# EAGLE board allinone (EAGLE 7.6.0), part 1 of 2
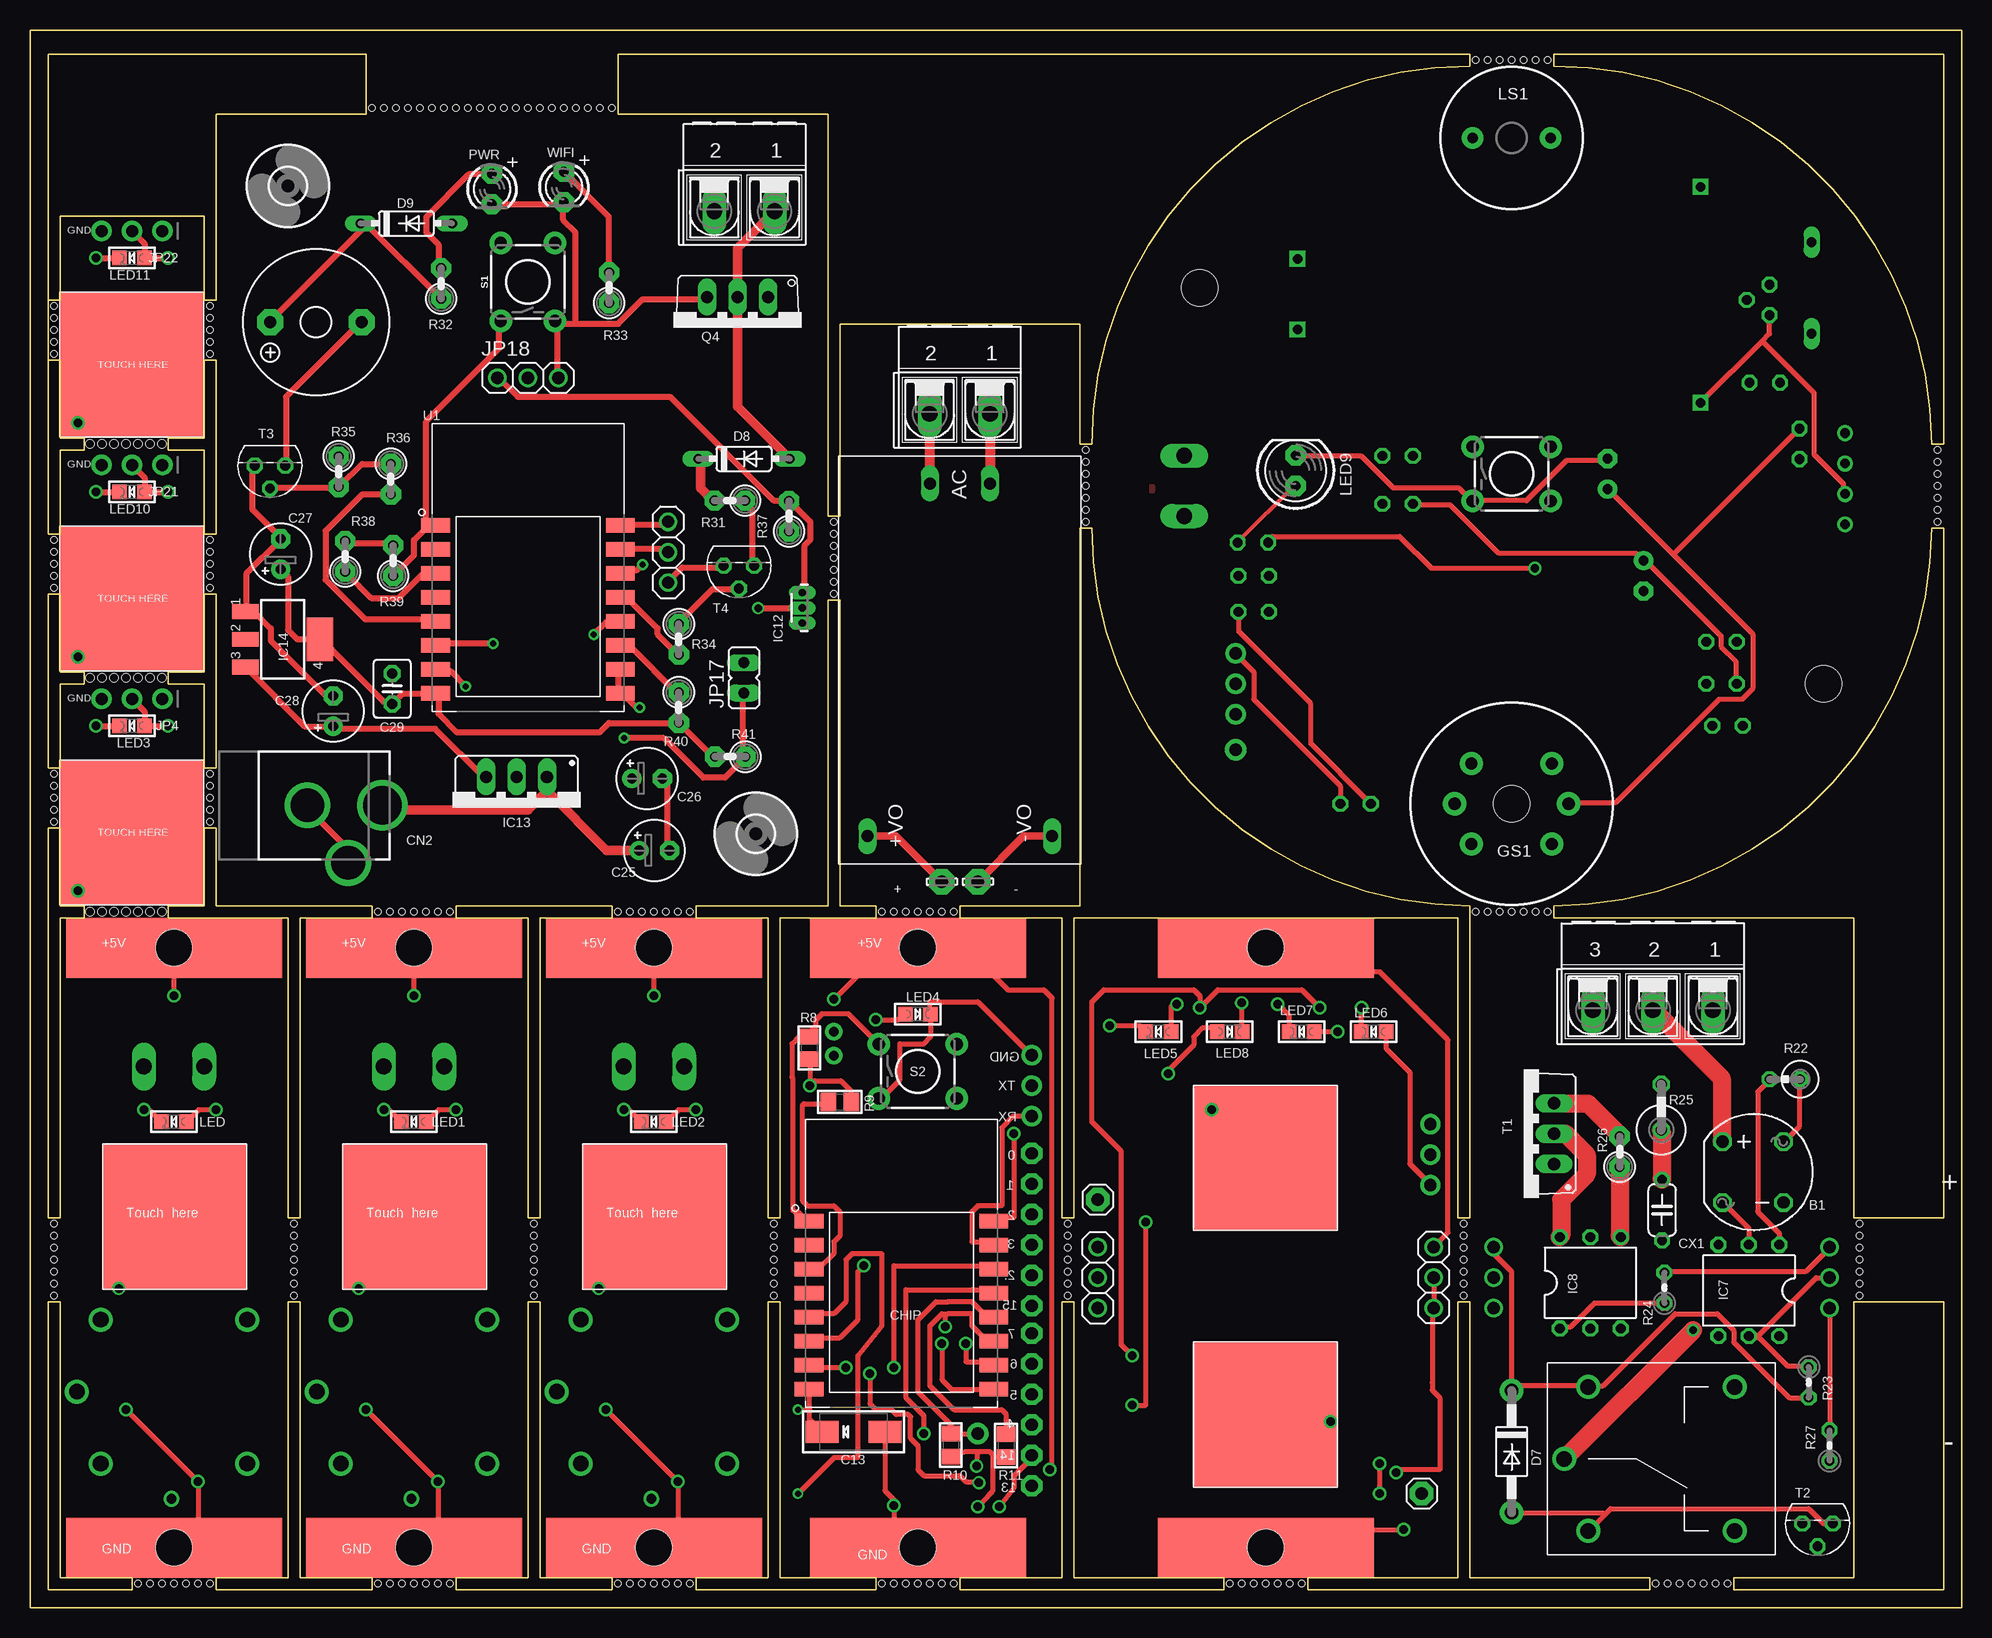
[diagram p0: board, top side]
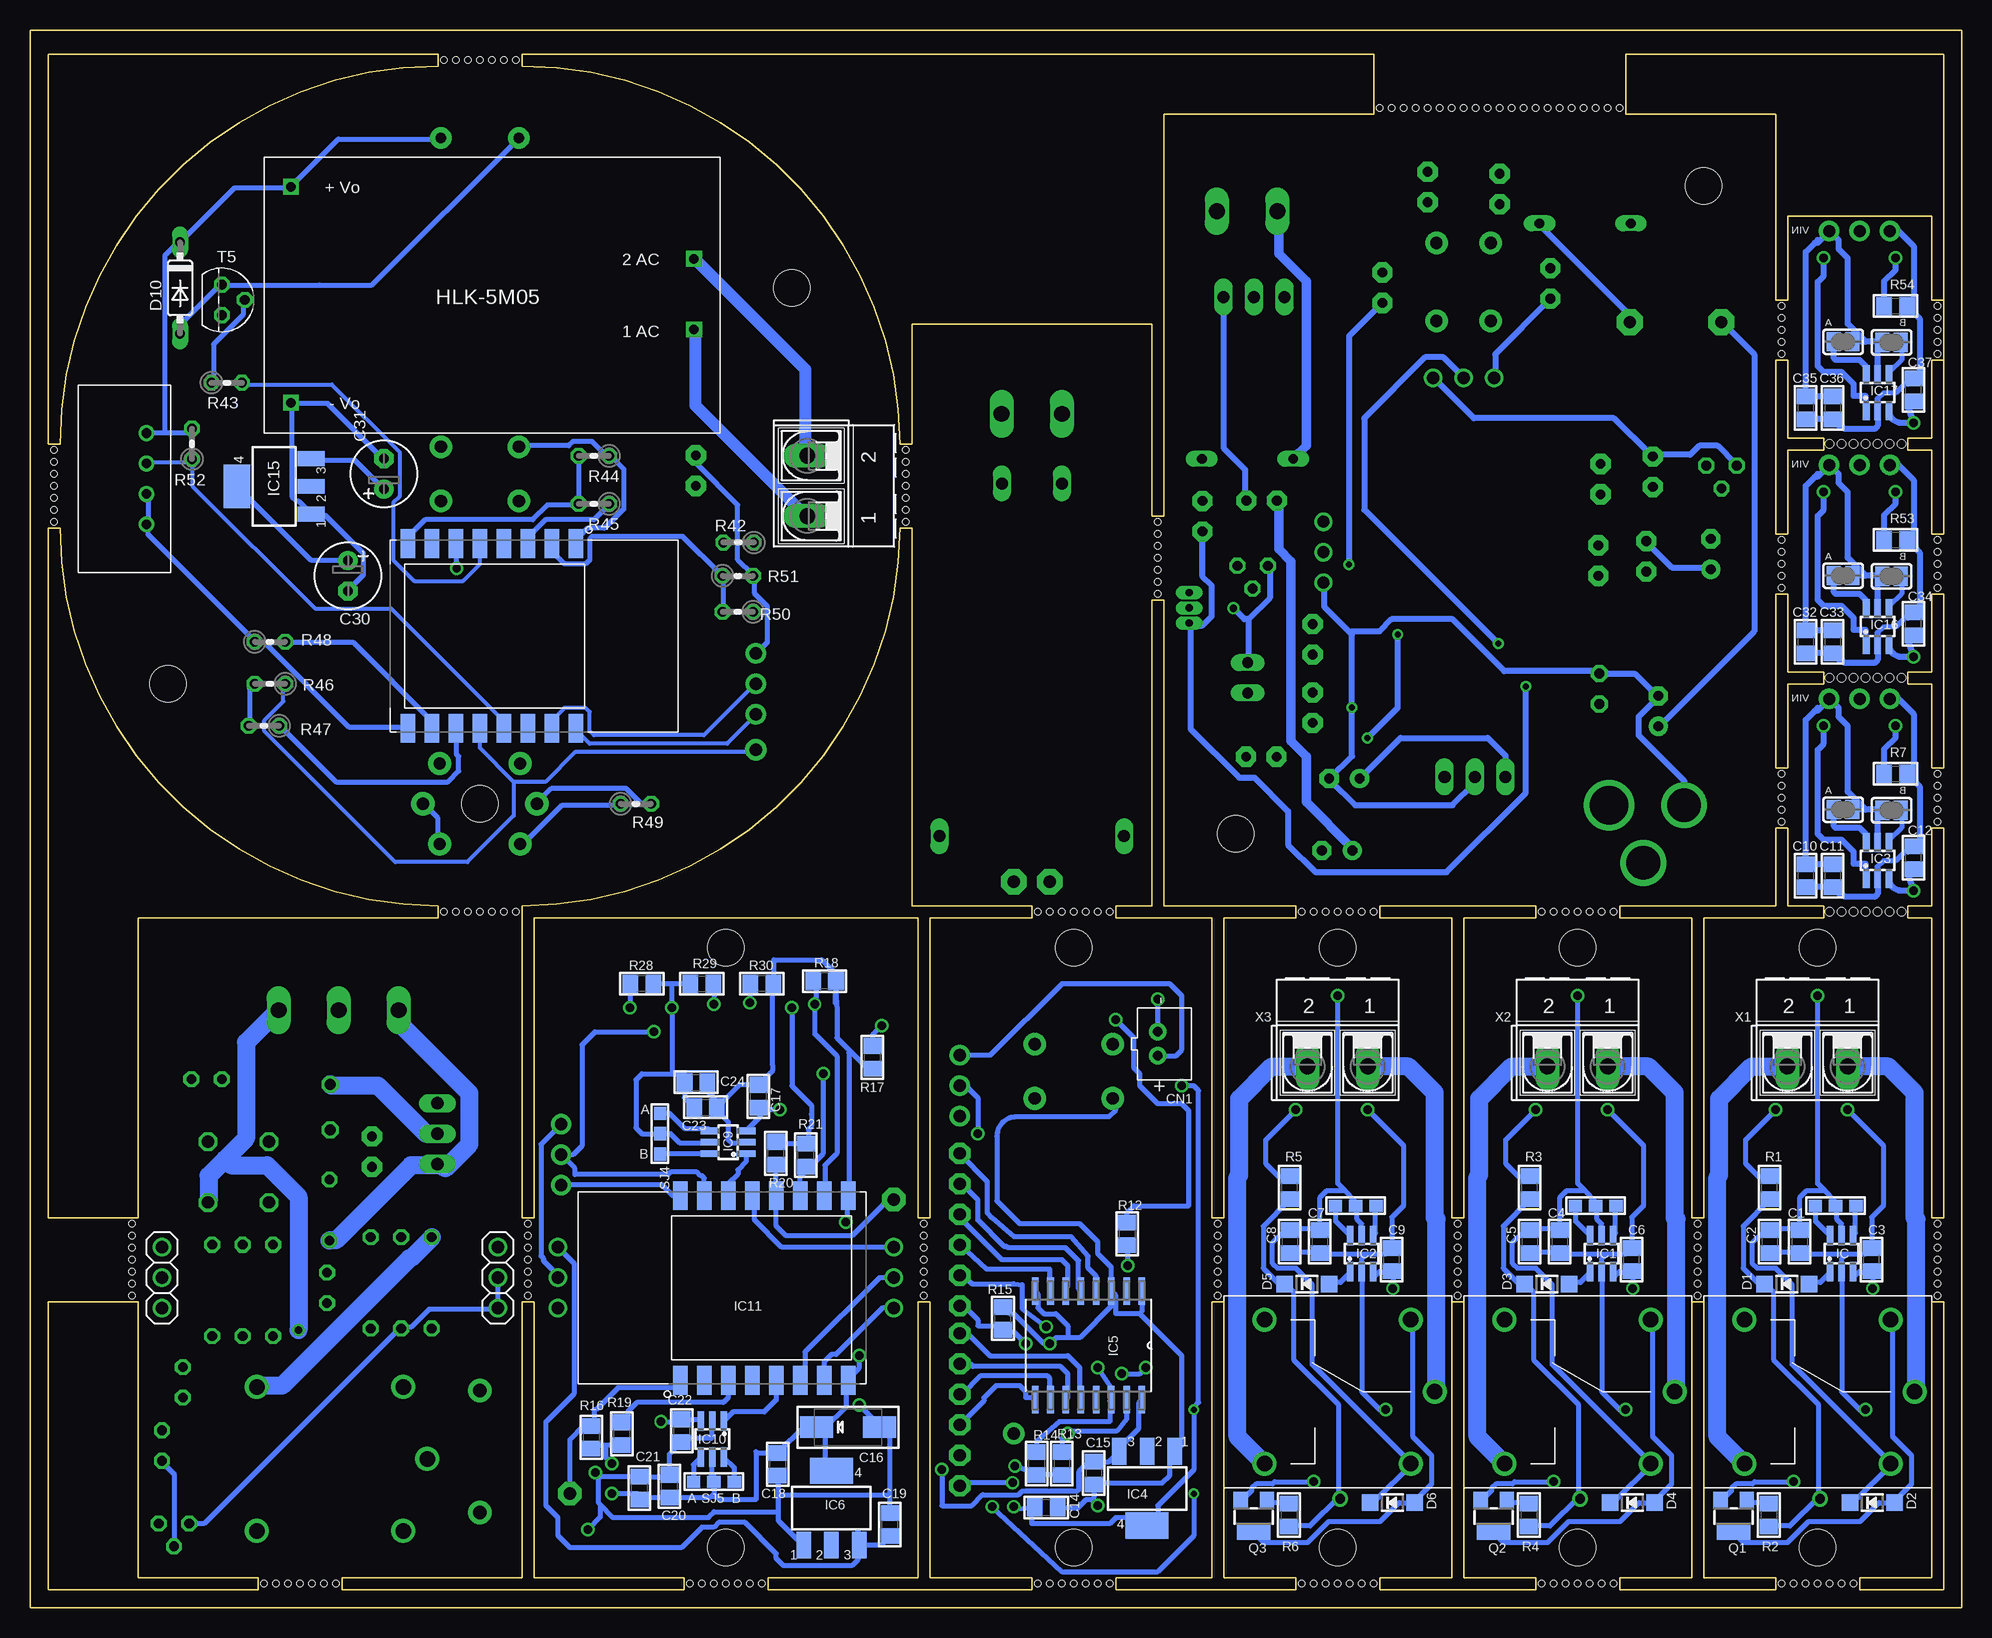
[diagram p1: board, bottom side, seen from below]

Size 161 x 131.5 mm. Coordinates in mm from the lower left corner, seen from the top.
Outline: 1.5,104 1.5,89.5 2.5,89.5 2.5,96.5 4.5,96.5 4.5,97.5 2.5,97.5 2.5,104 1.5,104
Outline: 1.5,104 1.5,109
Outline: 1.5,109 1.5,129.5 28,129.5 28,124.5 15.5,124.5 15.5,109 14.5,109 14.5,116 2.5,116 2.5,109 1.5,109
Outline: 2.5,2.5 8.5,2.5 8.5,1.5 1.5,1.5 1.5,25.5 2.5,25.5 2.5,2.5
Outline: 15.5,2.5 21.5,2.5 21.5,25.5 22.5,25.5 22.5,2.5 28.5,2.5 28.5,1.5 15.5,1.5 15.5,2.5
Outline: 21.5,32.5 21.5,57.5 11.5,57.5 11.5,58.5 14.5,58.5 14.5,65 15.5,65 15.5,58.5 28.5,58.5 28.5,57.5 22.5,57.5 22.5,32.5 21.5,32.5
Outline: 4.5,57.5 2.5,57.5 2.5,32.5 1.5,32.5 1.5,65 2.5,65 2.5,58.5 4.5,58.5 4.5,57.5
Outline: 35.5,2.5 41.5,2.5 41.5,25.5 42.5,25.5 42.5,2.5 48.5,2.5 48.5,1.5 35.5,1.5 35.5,2.5
Outline: 41.5,32.5 41.5,57.5 35.5,57.5 35.5,58.5 48.5,58.5 48.5,57.5 42.5,57.5 42.5,32.5 41.5,32.5
Outline: 55.5,2.5 61.5,2.5 61.5,25.5 62.5,25.5 62.5,2.5 70.5,2.5 70.5,1.5 55.5,1.5 55.5,2.5
Outline: 61.5,32.5 61.5,57.5 55.5,57.5 55.5,58.5 66.5,58.5 66.5,84 67.5,84 67.5,58.5 70.5,58.5 70.5,57.5 62.5,57.5 62.5,32.5 61.5,32.5
Outline: 14.5,70 14.5,77 11.5,77 11.5,78 14.5,78 14.5,84.5 15.5,84.5 15.5,70 14.5,70
Outline: 4.5,77 2.5,77 2.5,70 1.5,70 1.5,84.5 2.5,84.5 2.5,78 4.5,78 4.5,77
Outline: 77.5,2.5 86,2.5 86,25.5 87,25.5 87,2.5 99.5,2.5 99.5,1.5 77.5,1.5 77.5,2.5
Outline: 86,32.5 86,57.5 77.5,57.5 77.5,58.5 87.5,58.5 87.5,90 88.5,90 arc90 120,58.5 120,32.5 119,32.5 119,57.5 87,57.5 87,32.5 86,32.5
Outline: 67.5,107 67.5,91 66.5,91 66.5,124.5 49,124.5 49,129.5 120,129.5 120,128.5 arc90 88.5,97 87.5,97 87.5,107 67.5,107
Outline: 120,2.5 135,2.5 135,1.5 106.5,1.5 106.5,2.5 119,2.5 119,25.5 120,25.5 120,2.5
Outline: 142,2.5 152,2.5 152,25.5 159.5,25.5 159.5,1.5 142,1.5 142,2.5
Outline: 152,32.5 152,57.5 127,57.5 127,58.5 arc90 158.5,90 159.5,90 159.5,32.5 152,32.5
Outline: 15.5,104 15.5,89.5 14.5,89.5 14.5,96.5 11.5,96.5 11.5,97.5 14.5,97.5 14.5,104 15.5,104
Outline: 159.5,129.5 127,129.5 127,128.5 arc-90 158.5,97 159.5,97 159.5,129.5
Outline: 0,0 161,0 161,131.5 0,131.5 0,0
Copper layers (1*16): Top 0.035mm / dielectric 0.5mm / Bottom 0.035mm
Design rules "default *": minimum track width 12mil, minimum drill 10mil, track to track 8mil, track to pad 8mil, pad to pad 8mil, via to via 8mil, smd to smd 8mil, copper to edge 0.3mm, drill to drill 8mil, minimum pad ring 10mil, minimum via ring 8mil, stop-mask expansion 4mil, vias tented up to drill 0mil, thermal gap 10mil
Net classes: 1 AC: width 1.5 mm, clearance 0.381 mm to class 0, clearance 0.381 mm; 2 GPIO: width 0.35 mm, drill 0.7 mm, clearance 0.254 mm to class 0, clearance 0.254 mm to class 1, clearance 0.254 mm; 3 zerocross: width 0.35 mm, drill 0.7 mm, clearance 0.5 mm to class 0, clearance 0.5 mm to class 1, clearance 0.5 mm to class 2, clearance 0.3 mm
Holes 3 mm at 97.5,110 149.5,77
Holes 0.5 mm at 12,2 13,2 14,2 15,2 11,2 10,2 9,2 32,2 33,2 34,2 35,2 31,2 30,2 29,2 52,2 53,2 54,2 55,2 51,2 50,2 49,2 74,2 75,2 76,2 77,2 73,2 72,2 71,2 103,2 104,2 105,2 106,2 102,2 101,2 100,2 138.5,2 139.5,2 140.5,2 141.5,2 137.5,2 136.5,2 135.5,2 22,29 22,30 22,31 22,32 22,28 22,27 22,26 42,29 42,30 42,31 42,32 42,28 42,27 42,26 62,29 62,30 62,31 62,32 62,28 62,27 62,26 86.5,29 86.5,30 86.5,31 86.5,32 86.5,28 86.5,27 86.5,26 119.5,29 119.5,30 119.5,31 119.5,32 119.5,28 119.5,27 119.5,26 32,58 31,58 30,58 29,58 33,58 34,58 35,58 52,58 53,58 54,58 55,58 51,58 50,58 49,58 74,58 75,58 76,58 77,58 73,58 72,58 71,58 15,67.5 15,68.5 15,69.5 15,66.5 15,65.5 15,87 15,88 15,89 15,86 15,85 15,106.5 15,107.5 15,108.5 15,105.5 15,104.5 67,87.5 67,88.5 67,89.5 67,90.5 67,86.5 67,85.5 67,84.5 2,106.5 2,107.5 2,108.5 2,105.5 2,104.5 2,87 2,88 2,89 2,86 2,85 2,67.5 2,68.5 2,69.5 2,66.5 2,65.5 2,29 2,30 2,31 2,32 2,28 2,27 2,26 38.5,125 39.5,125 40.5,125 41.5,125 37.5,125 36.5,125 35.5,125 123.5,58 122.5,58 121.5,58 120.5,58 125.5,58 124.5,58 126.5,58 88,90.5 88,94.5 88,95.5 88,96.5 88,93.5 88,92.5 88,91.5 159,93.5 159,94.5 159,95.5 159,96.5 159,92.5 159,91.5 159,90.5 123.5,129 124.5,129 125.5,129 126.5,129 122.5,129 121.5,129 120.5,129 152.5,29 152.5,30 152.5,31 152.5,32 152.5,28 152.5,27 152.5,26 31.5,125 32.5,125 33.5,125 34.5,125 30.5,125 29.5,125 28.5,125 45.5,125 46.5,125 47.5,125 48.5,125 44.5,125 43.5,125 42.5,125
Holes 0.7 mm at 8,58 7,58 6,58 5,58 9,58 10,58 11,58 8,77.5 9,77.5 10,77.5 11,77.5 7,77.5 6,77.5 5,77.5 8,97 9,97 10,97 11,97 7,97 6,97 5,97

## Footprints (pad centres in the part's own frame; a part is rotated, then mirrored left to right if it is on the bottom)
AK500/2-H = drill 1.321 long: 1 -2.515,0; 2 2.515,0
RB1A = drill 1.016 octagon: + -2.54,2.54; - 2.54,-2.54; AC1 2.54,2.54; AC2 -2.54,-2.54
0805 = smd 1.3 x 1.5: 1 -0.95,0; 2 0.95,0
EIA6032-28/C-W = smd 2.75 x 1.8: + 2.625,0; - -2.625,0
E2,5-5 = drill 0.813 pad 1.6: + -1.27,0 | drill 0.813 pad 1.6 octagon: - 1.27,0
C025-030X050 = drill 0.813 pad 1.422 octagon: 1 -1.27,0; 2 1.27,0
E2,5-6 = drill 0.813 pad 1.6: + -1.27,0 | drill 0.813 pad 1.6 octagon: - 1.27,0
XCVR_ESP8266-12E/ESP-12E = smd 2.4 x 1.2: 1 -7.7,7; 2 -7.7,5; 3 -7.7,3; 4 -7.7,1; 5 -7.7,-1; 6 -7.7,-3; 7 -7.7,-5; 8 -7.7,-7; 15 7.7,-7; 16 7.7,-5; 17 7.7,-3; 18 7.7,-1; 19 7.7,1; 20 7.7,3; 21 7.7,5; 22 7.7,7
JST-PH-2-THM = drill 0.8 pad 1.422: 1 1,0; 2 -1,0
DCJACK_2MM_PTH = drill 2.8: GND 0,7.35; GNDBREAK 4.8,10.75 | drill 3.2: PWR 0,13.6
C050-024X044 = drill 0.813 octagon: 1 -2.54,0; 2 2.54,0
SOD-123 = smd 1.4 x 1.4: A 1.85,0; C -1.85,0
DO41-10 = drill 1.118 pad 1.93: A 5.08,0; C -5.08,0
DO35-7 = drill 0.813 long: A 3.81,0; C -3.81,0
DHT22 = drill 0.8: P$1 2.54,-2; P$2 5.08,-2; P$3 7.62,-2; P$4 10.16,-2
GAS_SENSOR = drill 1.016 pad 1.93: A1 -3.35,3.35; A2 -3.35,-3.35; B1 3.35,3.35; B2 3.35,-3.35; HA -4.75,0; HB 4.75,0 | hole 3: 0,0
BREAKOUT_SOT23-6 = smd 0.55 x 1.6: 1 -0.95,-1.5; 2 0,-1.5; 3 0.95,-1.5; 4 0.95,1.5; 5 0,1.5; 6 -0.95,1.5
SOT223 = smd 1.219 x 2.235: 1 -2.311,-3.099; 2 0,-3.099; 3 2.311,-3.099 | smd 3.6 x 2.2: 4 0,3.099
SOIC127P1032X265-16N = smd 2.286 x 0.559: 1 -4.521,4.445; 2 -4.521,3.175; 3 -4.521,1.905; 4 -4.521,0.635; 5 -4.521,-0.635; 6 -4.521,-1.905; 7 -4.521,-3.175; 8 -4.521,-4.445; 9 4.521,-4.445; 10 4.521,-3.175; 11 4.521,-1.905; 12 4.521,-0.635; 13 4.521,0.635; 14 4.521,1.905; 15 4.521,3.175; 16 4.521,4.445
DIL06 = drill 0.813 octagon: 1 -2.54,-3.81; 2 0,-3.81; 3 2.54,-3.81; 4 2.54,3.81; 5 0,3.81; 6 -2.54,3.81
SIP3-UA = drill 0.6 pad 0.7 long: 1 -1.27,0; 2 0,0; 3 1.27,0
78XXS = drill 1.016 long: GND 0,-2.54; IN -2.54,-2.54; OUT 2.54,-2.54
SOLDERJUMPER_REFLOW = smd 1.168 x 1.6: 1 -0.762,0; 2 0.762,0
1X01_2MM = drill 0.8 pad 1.27: 1 0,0
1X03_ROUND = drill 1 pad 1.676: 1 -2.54,0; 2 0,0; 3 2.54,0
1X06-CLEANBIG = drill 1.016 pad 1.778 octagon: 1 -6.35,0; 2 -3.81,0; 3 -1.27,0; 4 1.27,0; 5 3.81,0; 6 6.35,0
1X01-CLEANBIG = drill 1.016 pad 1.778: 1 0,0
1X03-CLEANBIG = drill 1.016 pad 1.676: 1 -2.54,0; 2 0,0; 3 2.54,0
1X03 = drill 1.016: 1 -2.54,0; 2 0,0; 3 2.54,0
1X01 = drill 1.016 pad 1.93 octagon: 1 0,0
JP1 = drill 0.914 long: 1 0,-1.27; 2 0,1.27
CHIPLED_0805 = smd 1.2 x 1.2: A 0,-1.05; C 0,1.05
LED5MM = drill 0.813 pad 1.676 octagon: A -1.27,0; K 1.27,0
BUZZER-12MM = drill 0.9 pad 1.778: + 3.25,0; - -3.25,0
LSP10 = drill 1.016 pad 2.159 octagon: MP 0,0
JQC3FC = drill 1.3 pad 2: + -6.2,6; _ -6.2,-6; COM -8.2,0; NC 6,-6; NO 6,6
HLK-PM01 = drill 1 long: P$1 -14.7,2.5; P$2 -14.7,-2.5; P$3 14.7,7.7; P$4 14.7,-7.7
CAP_TOUCHPAD = smd 12 x 12: P$1 0,0
LED3MM = drill 0.813 pad 1.676 octagon: A -1.27,0; K 1.27,0
SOT23-W = smd 1.2 x 1.4: 1 -1.1,-1.3; 2 1.1,-1.3 | smd 2.8 x 1.4: 3 0,1.3
TO220V = drill 1.016 long: 1 -2.54,-2.54; 2 0,-2.54; 3 2.54,-2.54
0309V = drill 0.813 octagon: 1 -1.27,0; 2 1.27,0
0204V = drill 0.813 octagon: 1 -1.27,0; 2 1.27,0
0411V = drill 0.914 octagon: 1 -2.54,0; 2 1.27,0
0207/2V = drill 0.813 pad 1.676 octagon: 1 -1.27,0; 2 1.27,0
STRIP = smd 18 x 5: STRIP 0,0 | hole 3: 0,0
TACTILE_SWITCH_PTH_6.0MM = drill 1.016 pad 1.88: 1 -3.251,2.261; 2 3.251,2.261; 3 -3.251,-2.261; 4 3.251,-2.261
TACTILE_SWITCH_PTH_6.0MM_KIT = drill 1.016 pad 1.88: 1 -3.251,2.261; 2 3.251,2.261; 3 -3.251,-2.261; 4 3.251,-2.261
F/TMB = drill 1.016 pad 2.159 octagon: + 3.81,0; - -3.81,0
SOLDERJUMPER_2WAY_OPEN_0603 = smd 1.1 x 1: 1 -1.7,0; 2 0,0; 3 1.7,0
TO220BV = drill 1.016 long: G 2.54,-2.54; T1 -2.54,-2.54; T2 0,-2.54
TO92 = drill 0.813 octagon: 1 1.27,0; 2 0,1.905; 3 -1.27,0
MOUNTINGHOLE_3.0 = hole 3: 0,0
HLK-5M05 = drill 0.8 square: 1 -16.85,-2.93; 2 -16.85,2.97; 3 16.75,9.07; 4 16.75,-8.93
AK500/3-H = drill 1.321 long: 1 -5.004,0; 2 0,0; 3 5.004,0

## Placement (x,y rotation side)
AC  [AK500/2-H]  96.21,93.5 90 bottom
B1  W04/6/8/10  [RB1A]  143.63,36.3 0 top
C1  10uf  [0805]  13.5,30.5 270 bottom
C2  0.1uf  [0805]  16,30.5 270 bottom
C3  50pF  [0805]  7.5,29 90 bottom
C4  10uf  [0805]  33.5,30.5 270 bottom
C5  0.1uf  [0805]  36,30.5 270 bottom
C6  50pF  [0805]  27.5,29 90 bottom
C7  10uf  [0805]  53.5,30.5 270 bottom
C8  0.1uf  [0805]  56,30.5 270 bottom
C9  50pF  [0805]  47.5,29 90 bottom
C10  10uf  [0805]  13,61 270 bottom
C11  0.1uf  [0805]  10.75,61 270 bottom
C12  50pf  [0805]  4,62.5 90 bottom
C13  100UF  [EIA6032-28/C-W]  68.64,14.65 180 top
C14  [0805]  76.3,8.35 0 bottom
C15  [0805]  72.33,11.21 270 bottom
C16  100UF  [EIA6032-28/C-W]  92.82,15.03 180 bottom
C17  50pF  [0805]  100.28,42.61 90 bottom
C18  10uF  [0805]  98.68,11.94 270 bottom
C19  10uF  [0805]  89.32,6.91 90 bottom
C20  10uf  [0805]  107.7,10.11 90 bottom
C21  0.1uf  [0805]  110.2,9.96 90 bottom
C22  50pF  [0805]  106.68,14.74 270 bottom
C23  10uf  [0805]  104.69,41.7 0 bottom
C24  0.1uf  [0805]  105.49,43.78 0 bottom
C25  [E2,5-5]  52.05,63.11 0 top
C26  [E2,5-5]  51.43,69.11 0 top
C27  [E2,5-5]  20.89,87.81 90 top
C28  [E2,5-5]  25.27,74.72 90 top
C29  [C025-030X050]  30.19,76.59 90 top
C30  [E2,5-6]  134.5,86 270 bottom
C31  [E2,5-6]  131.5,94.5 90 bottom
C32  10uf  [0805]  13,80.5 270 bottom
C33  0.1uf  [0805]  10.75,80.5 270 bottom
C34  50pf  [0805]  4,82 90 bottom
C35  10uf  [0805]  13,100 270 bottom
C36  0.1uf  [0805]  10.75,100 270 bottom
C37  50pf  [0805]  4,101.5 90 bottom
CHIP  ESP-12E  [XCVR_ESP8266-12E/ESP-12E]  72.64,25.2 0 top
CN1  [JST-PH-2-THM]  67,47 270 bottom
CN2  [DCJACK_2MM_PTH]  15.77,66.87 270 top
CX1  [C050-024X044]  136.04,33.13 270 top
D1  BAT54T1G  [SOD-123]  14.56,26.96 0 bottom
D2  BAT54T1G  [SOD-123]  7.44,8.75 0 bottom
D3  BAT54T1G  [SOD-123]  34.56,26.96 0 bottom
D4  BAT54T1G  [SOD-123]  27.44,8.75 0 bottom
D5  BAT54T1G  [SOD-123]  54.56,26.96 0 bottom
D6  BAT54T1G  [SOD-123]  47.44,8.75 0 bottom
D7  1N4004  [DO41-10]  123.5,13 270 top
D8  1N4148DO35-7  [DO35-7]  59.51,95.76 0 top
D9  1N4148DO35-7  [DO35-7]  31.37,115.38 0 top
D10  1N4148DO35-7  [DO35-7]  148.5,110 270 bottom
DHT22  DHT22  [DHT22]  149.28,100.44 270 bottom
GS1  GAS_SENSORMQ-3  [GAS_SENSOR]  123.5,67 180 top
IC  ttp223  [BREAKOUT_SOT23-6]  10,29.5 0 bottom
IC1  ttp223  [BREAKOUT_SOT23-6]  30,29.5 0 bottom
IC2  ttp223  [BREAKOUT_SOT23-6]  50,29.5 0 bottom
IC3  ttp223  [BREAKOUT_SOT23-6]  6.99,62.28 0 bottom
IC4  AMS1117  [SOT223]  67.89,9.92 180 bottom
IC5  PCF8574  [SOIC127P1032X265-16N]  72.77,21.85 270 bottom
IC6  ams117  [SOT223]  94.2,8.3 0 bottom
IC7  mct2e  [DIL06]  143.28,26.43 180 top
IC8  moc3051  [DIL06]  130.06,27.07 0 top
IC9  ttp223  [BREAKOUT_SOT23-6]  102.81,38.78 90 bottom
IC10  ttp23  [BREAKOUT_SOT23-6]  104.12,14.04 180 bottom
IC11  ESP8266-12E/ESP-12E  [XCVR_ESP8266-12E/ESP-12E]  99.8,26.64 90 bottom
IC12  A1202UA  [SIP3-UA]  64.38,83.33 270 top
IC13  [78XXS]  40.55,66.7 180 top
IC14  317EMP  [SOT223]  21.06,80.71 270 top
IC15  ams117  [SOT223]  140.65,93.46 90 bottom
IC16  ttp223  [BREAKOUT_SOT23-6]  6.99,81.78 0 bottom
IC17  ttp223  [BREAKOUT_SOT23-6]  6.99,101.28 0 bottom
J1  [SOLDERJUMPER_REFLOW]  5.83,66.46 0 bottom
J2  [SOLDERJUMPER_REFLOW]  9.87,66.51 180 bottom
J3  [SOLDERJUMPER_REFLOW]  9.87,86.01 180 bottom
J4  [SOLDERJUMPER_REFLOW]  5.83,85.96 0 bottom
J5  [SOLDERJUMPER_REFLOW]  9.87,105.51 180 bottom
J6  [SOLDERJUMPER_REFLOW]  5.83,105.46 0 bottom
JP1  [1X01_2MM]  11.78,9.06 0 bottom
JP2  [1X01_2MM]  31.78,9.06 0 bottom
JP3  [1X01_2MM]  51.78,9.06 0 bottom
JP4  [1X03_ROUND]  8.5,75.75 180 top
JP5  [1X06-CLEANBIG]  83.5,31.5 90 top
JP6  [1X06-CLEANBIG]  83.5,16.5 270 top
JP7  [1X01-CLEANBIG]  79,14.5 0 top
JP8  [1X03-CLEANBIG]  83.5,43.5 90 top
JP9  [1X03]  150,27.5 90 bottom
JP10  [1X03]  122,27.5 90 bottom
JP11  [1X03]  89,27.5 90 top
JP12  [1X03]  117,27.5 270 top
JP13  [1X03-CLEANBIG]  116.73,37.75 90 top
JP14  [1X01]  116,9.5 0 top
JP15  [1X01]  89,34 0 top
JP16  [1X03]  53.19,87.97 90 top
JP17  [JP1]  59.5,77.5 0 top
JP18  [1X03]  41.5,102.5 0 top
JP19  [1X03-CLEANBIG]  100.5,77 90 bottom
JP20  [1X01-CLEANBIG]  100.5,71.5 0 bottom
JP21  [1X03_ROUND]  8.5,95.25 180 top
JP22  [1X03_ROUND]  8.5,114.75 180 top
LED  BLUE  [CHIPLED_0805]  12,40.5 90 top
LED1  BLUE  [CHIPLED_0805]  32,40.5 90 top
LED2  BLUE  [CHIPLED_0805]  52,40.5 90 top
LED3  blue  [CHIPLED_0805]  8.5,73.5 90 top
LED4  BLUE  [CHIPLED_0805]  74,49.47 270 top
LED5  BLUE  [CHIPLED_0805]  94.06,48 90 top
LED6  BLUE  [CHIPLED_0805]  112,48 90 top
LED7  BLUE  [CHIPLED_0805]  106,48 90 top
LED8  BLUE  [CHIPLED_0805]  100,48 270 top
LED9  [LED5MM]  105.5,94.77 90 top
LED10  blue  [CHIPLED_0805]  8.5,93 90 top
LED11  blue  [CHIPLED_0805]  8.5,112.5 90 top
LS1  BUZZER-PTH  [BUZZER-12MM]  123.5,122.5 0 top
LSP1  LSP10  [LSP10]  76,60.5 0 top
LSP2  LSP10  [LSP10]  79,60.5 0 top
M1  JQC3FC  [JQC3FC]  12.1,18 180 bottom
M2  JQC3FC  [JQC3FC]  32.1,18 180 bottom
M3  JQC3FC  [JQC3FC]  52.1,18 180 bottom
MODULE  HLK-PM01  [HLK-PM01]  77.5,79 270 top
PAD  pad  [CAP_TOUCHPAD]  12.1,32.6 0 top
PAD1  pad  [CAP_TOUCHPAD]  32.1,32.6 0 top
PAD2  pad  [CAP_TOUCHPAD]  52.1,32.6 0 top
PAD3  pad  [CAP_TOUCHPAD]  8.5,64.62 0 top
PAD4  pad2  [CAP_TOUCHPAD]  103,16.1 0 top
PAD5  pad1  [CAP_TOUCHPAD]  103,37.5 0 top
PAD6  pad  [CAP_TOUCHPAD]  8.5,84.12 0 top
PAD7  pad  [CAP_TOUCHPAD]  8.5,103.62 0 top
PWR  [LED3MM]  38.5,118.25 270 top
Q1  2N2222  [SOT23-W]  19,7.63 180 bottom
Q2  2N2222  [SOT23-W]  39,7.63 180 bottom
Q3  2N2222  [SOT23-W]  59,7.63 180 bottom
Q4  [TO220V]  58.98,106.7 180 top
R1  1k  [0805]  16,35 90 bottom
R2  1k  [0805]  16.06,7.71 270 bottom
R3  1k  [0805]  36,35 90 bottom
R4  1k  [0805]  36.06,7.71 270 bottom
R5  1k  [0805]  56,35 90 bottom
R6  1k  [0805]  56.06,7.71 270 bottom
R7  1k  [0805]  5.5,69.5 0 bottom
R8  12K  [0805]  64.95,46.65 270 top
R9  12K  [0805]  67.5,42.15 0 top
R10  12k  [0805]  76.75,13.55 270 top
R11  12k  [0805]  81.35,13.5 270 top
R12  220  [0805]  69.55,31.15 270 bottom
R13  10K  [0805]  75,12 270 bottom
R14  10K  [0805]  77.1,12 270 bottom
R15  12k  [0805]  79.9,24.1 90 bottom
R16  12k  [0805]  114.22,14.19 270 bottom
R17  220  [0805]  90.78,45.86 90 bottom
R18  12k  [0805]  94.76,52.22 180 bottom
R19  12k  [0805]  111.68,14.49 270 bottom
R20  12k  [0805]  98.82,37.86 90 bottom
R21  12k  [0805]  96.32,37.71 90 bottom
R22  180k  [0309V]  146.28,44.04 180 top
R23  10k  [0204V]  148.26,18.77 270 top
R24  100  [0204V]  136.24,26.65 90 top
R25  33  [0411V]  135.97,42.35 90 top
R26  330  [0207/2V]  132.5,38 90 top
R27  1k  [0204V]  150,13.5 90 top
R28  220  [0805]  110,52 180 bottom
R29  220  [0805]  105,52 0 bottom
R30  220\  [0805]  100,52 180 bottom
R31  10k  [0207/2V]  58.33,92.27 180 top
R32  200  [0207/2V]  34.27,110.37 90 top
R33  100  [0207/2V]  48.27,110.02 90 top
R34  1k  [0207/2V]  54.08,80.71 270 top
R35  10k  [0207/2V]  25.73,94.68 270 top
R36  1k  [0207/2V]  30.08,94.06 270 top
R37  10k  [0207/2V]  63.27,90.97 90 top
R38  10k  [0207/2V]  26.27,87.62 90 top
R39  10k  [0207/2V]  30.27,87.27 90 top
R40  10k  [0207/2V]  54.08,75.01 270 top
R41  10k  [0207/2V]  58.36,70.92 180 top
R42  220  [0204V]  101.94,88.78 180 bottom
R43  330  [0204V]  144.6,102.1 0 bottom
R44  12k  [0204V]  114,96 180 bottom
R45  12k  [0204V]  114,92 180 bottom
R46  12k  [0204V]  141,77 180 bottom
R47  12k  [0204V]  141.5,73.5 180 bottom
R48  12k  [0204V]  141,80.5 0 bottom
R49  10k  [0204V]  110.5,67 0 bottom
R50  [0204V]  102,83 180 bottom
R51  [0204V]  102,86 0 bottom
R52  10k  [0204V]  147.5,97 90 bottom
R53  1k  [0805]  5.5,89 0 bottom
R54  1k  [0805]  5.5,108.5 0 bottom
RAIL1  RAIL1  [STRIP]  12,55 0 top
RAIL2  RAIL2  [STRIP]  12,5 0 top
RAIL3  RAIL1  [STRIP]  32,55 0 top
RAIL4  RAIL2  [STRIP]  32,5 0 top
RAIL5  RAIL1  [STRIP]  52,55 0 top
RAIL6  RAIL2  [STRIP]  52,5 0 top
RAIL7  RAIL1  [STRIP]  74,55 0 top
RAIL8  RAIL2  [STRIP]  74,5 0 top
S1  RST  [TACTILE_SWITCH_PTH_6.0MM]  41.5,110.5 90 top
S2  MOMENTARY-SWITCH-SPST-PTH-6.0MM  [TACTILE_SWITCH_PTH_6.0MM_KIT]  74,44.7 0 top
S3  MOMENTARY-SWITCH-SPST-PTH-6.0MM  [TACTILE_SWITCH_PTH_6.0MM_KIT]  123.5,94.5 0 top
SG1  F/TMB  [F/TMB]  23.84,107.15 180 top
SJ1  [SOLDERJUMPER_2WAY_OPEN_0603]  30.5,33.5 180 bottom
SJ2  [SOLDERJUMPER_2WAY_OPEN_0603]  10.5,33.5 180 bottom
SJ3  [SOLDERJUMPER_2WAY_OPEN_0603]  50.5,33.5 180 bottom
SJ4  [SOLDERJUMPER_2WAY_OPEN_0603]  108.5,39.5 270 bottom
SJ5  [SOLDERJUMPER_2WAY_OPEN_0603]  104,10.5 0 bottom
T1  BT138-V  [TO220BV]  124.5,39.5 90 top
T2  BC547  [TO92]  149,7 180 top
T3  BC547  [TO92]  20,95.19 180 top
T4  BC547  [TO92]  59.09,86.84 180 top
T5  BC547  [TO92]  145,109 270 bottom
U1  ESP8266-12E/ESP-12E  [XCVR_ESP8266-12E/ESP-12E]  41.5,83.2 0 top
U2  ESP8266-12E/ESP-12E  [XCVR_ESP8266-12E/ESP-12E]  122.5,81 270 bottom
U$1  JQC3FC  [JQC3FC]  136.09,12.39 0 top
U$2  STRIP  [STRIP]  103,55 0 top
U$3  STRIP  [STRIP]  103,5 0 top
U$4  [MOUNTINGHOLE_3.0]  21.5,118.5 0 top
U$5  [MOUNTINGHOLE_3.0]  60.5,64.5 0 top
U$6  HLK-5M05  [HLK-5M05]  122.5,109.5 180 bottom
WIFI  [LED3MM]  44.5,118.41 270 top
X1  [AK500/2-H]  12,45.09 180 bottom
X2  [AK500/2-H]  32,45.09 180 bottom
X3  [AK500/2-H]  52,45.09 180 bottom
X4  [AK500/2-H]  77.5,99.5 180 top
X5  [AK500/3-H]  135.28,49.79 180 top
X6  [AK500/2-H]  59.55,116.4 180 top

## Library data of the parts
AC X1-X6 = con-ptr500; OC_FARNELL: unknown; OC_NEWARK: unknown
B1 = rectifier
C1-C24 C32-C37 D1-D6 IC IC1-IC3 IC9 IC10 IC16 IC17 J1-J6 JP1-JP4 JP21 JP22 LED LED1-LED8 LED10 LED11 Q1-Q3 R1-R21 R28-R30 R53 R54 SJ1-SJ5 U$4 U$5 = microbuilder
C25-C29 CN1 CN2 D7 JP5-JP16 JP18-JP20 LED9 PWR Q4 R25 R26 R31-R41 WIFI = adafruit
C30 C31 R22-R24 R27 = rcl
CHIP IC11 U1 U2 = ESP8266-12E_ESP-12E; AVAILABILITY: Unavailable; DESCRIPTION: This WiFi module has a 32-bit MCU micro and clock speeds supporting 80 MHz or 160 MHz. Supports the RTOS and integrated Wi-Fi MAC/BB/RF/PA/LNA, and has an on-board antenna.; MF: AI-Thinker; MP: ESP8266-12E/ESP-12E; PACKAGE: None; PRICE: None
CX1 R42-R52 = resistor
D8-D10 = diode
DHT22 M1-M3 PAD PAD1-PAD7 RAIL1-RAIL8 U$1-U$3 = Alfred
GS1 = SparkFun-Sensors; PROD_ID: COMP-12216; SF_ID: SEN-08880
IC4 IC6 IC14 IC15 = linear
IC5 = PCF8574AT_3_518; DESCRIPTION: PCF8574 Series 2.5 - 6 V Remote 8-bit I/O Expander for I2C-bus - SOIC-16; DIGI-KEY_PART_NUMBER: 568-1074-1-ND; DIGI-KEY_PURCHASE_URL: https://www.digikey.com/product-detail/en/nxp-usa-inc/PCF8574AT-3,518/568-1074-1-ND/735790?utm_source=snapeda&utm_medium=aggregator&utm_campaign=symbol; MF: NXP USA; MP: PCF8574AT/3,518; PACKAGE: SOIC-16 NXP Semiconductors
IC7 IC8 = ic-package
IC12 = allegro; OC_FARNELL: unknown; OC_NEWARK: unknown
IC13 = v-reg
JP17 = jumper
LS1 = SparkFun-Electromechanical; PROD_ID: COMP-08253; SF_SKU: COM-07950
LSP1 LSP2 = solpad
MODULE = HLK-PM01; AVAILABILITY: Unavailable; MF: Hi-link; MP: hlk-pm01; PACKAGE: Package Analog Devices; PRICE: None
S1-S3 = SparkFun-Switches; PROD_ID: SWCH-08441; SF_SKU: COM-00097
SG1 = buzzer; OC_FARNELL: unknown; OC_NEWARK: unknown
T1 = triac
T2-T5 = transistor
U$6 = HLK-5M05; AVAILABILITY: Unavailable; MF: Hi-link; MP: HLK-5M05; PACKAGE: Package Analog Devices; PRICE: None

## Nets
+: IC10.1 IC11.5
+3V1: C16.+ C18.1 C20.1 C21.1 C23.1 C24.1 IC6.4 IC9.5 IC10.5 IC11.8 R16.2 R19.2 R20.2 R21.2 R28.1 R29.1 SJ4.2 SJ5.2
+3V2: C27.+ C29.1 IC14.4 R38.2 R39.2 R40.2 R41.2 U1.8
+3V3: C13.+ C14.1 CHIP.8 IC4.4 R8.2 R9.2 R10.2 R11.2 R13.2 R14.2
+3V4: C30.+ IC15.4 R44.2 R45.2 R46.2 R47.2 U2.8
+5V: C1.1 C2.1 D2.C IC.5 M1.+ RAIL1.STRIP SJ2.2
+5V1: C4.1 C5.1 D4.C IC1.5 M2.+ RAIL3.STRIP SJ1.2
+5V2: C7.1 C8.1 D6.C IC2.5 M3.+ RAIL5.STRIP SJ3.2
+5V3: C10.1 C11.1 IC3.5 J1.1 J2.1 JP4.1
+5V4: C15.1 CN1.2 IC4.3 IC5.16 RAIL7.STRIP
+5V5: C19.1 IC6.3 JP12.1 U$2.STRIP
+5V6: C26.+ C28.+ D9.C IC12.1 IC13.OUT IC14.3 JP18.1 R32.1 R37.2 SG1.+
+5V7: C31.+ D10.C DHT22.P$1 GS1.A1 GS1.HA IC15.3 LS1.+ R52.2 U$6.4
+5V8: C32.1 C33.1 IC16.5 J3.1 J4.1 JP21.1
+5V9: C35.1 C36.1 IC17.5 J5.1 J6.1 JP22.1
+5V/1: LSP1.MP MODULE.P$4
+5V/2: D7.C JP10.3 R23.2 U$1.+
+12V [AC]: C25.+ CN2.PWR D8.C IC13.IN R31.2 X6.2
-: IC9.1 IC11.20
AC1 [AC]: M1.COM X1.1
AC2 [AC]: M1.NO X1.2
AC3 [AC]: M2.COM X2.1
AC4 [AC]: M2.NO X2.2
AC5 [AC]: M3.COM X3.1
AC6 [AC]: M3.NO X3.2
ADC: R50.2 R51.1 U2.2
BUTTON: JP18.2 U1.6
BUZZER: R36.2 U1.5
FAN [AC]: CX1.2 T1.T1 X5.3
FIRING: JP9.3 R24.2
FLASH: IC11.18 JP15.1 R20.1
GND: C1.2 C2.2 C3.2 IC.2 LED.C Q1.2 RAIL2.STRIP
GND1: C4.2 C5.2 C6.2 IC1.2 LED1.C Q2.2 RAIL4.STRIP
GND2: C7.2 C8.2 C9.2 IC2.2 LED2.C Q3.2 RAIL6.STRIP
GND3: C10.2 C11.2 C12.2 IC3.2 JP4.3 R7.2
GND4: C13.- C14.2 C15.2 CHIP.15 CN1.1 IC4.1 IC5.1 IC5.3 IC5.8 JP8.3 LED4.C R15.2 RAIL8.STRIP S2.3
GND5: LSP2.MP MODULE.P$3
GND6: C16.- C17.2 C18.2 C19.2 C20.2 C21.2 C22.2 C23.2 C24.2 IC6.1 IC9.2 IC10.2 IC11.15 JP12.2 JP12.3 JP13.3 R17.1 R18.1 R30.1 U$3.STRIP
GND7: IC8.2 JP10.1 JP10.2 T2.1
GND8: C25.- C26.- C27.- C28.- C29.2 CN2.GND CN2.GNDBREAK IC12.2 IC13.GND IC14.1 JP16.1 JP17.2 JP18.3 PWR.K Q4.3 R35.1 S1.3 T3.1 T4.1 U1.15 U1.16 WIFI.K
GND9: C30.- C31.- DHT22.P$3 DHT22.P$4 GS1.HB IC15.1 JP19.3 LED9.K R48.1 R49.2 R51.2 S3.3 T5.1 U2.15 U$6.3
GND10: C32.2 C33.2 C34.2 IC16.2 JP21.3 R53.2
GND11: C35.2 C36.2 C37.2 IC17.2 JP22.3 R54.2
GPIO0: CHIP.18 JP7.1 R10.1
GPIO1: IC11.7 JP11.1
GPIO2: CHIP.17 JP5.2 R11.1
GPIO3: IC11.16 LED5.A R18.2
GPIO4: IC11.17 LED8.A R21.1
GPIO5: IC11.19 JP11.3
GPIO6 [GPIO]: DHT22.P$2 R52.1 U2.19
GPIO7 [GPIO]: JP20.1 R46.1 U2.18
GPIO8 [GPIO]: R43.2 U2.5
GPIO9: R42.2 U2.6
GPIO10: U2.7
GPIO11: U2.20
GPIO12: IC11.6 JP11.2
GPIO13: CHIP.7 JP6.6
GPIO14: CHIP.5 JP6.5
GPIO15: CHIP.16 JP5.1 R15.1
HALL_SENSOR: IC12.3 R37.1 U1.7
HOT [AC]: B1.- U$1.COM X5.1
HOT1 [AC]: IC8.6 R25.2 T1.T2 U$1.NO
LED: R33.1 U1.20
N$1: LED.A R1.2
N$2: D1.A IC.1
N$3: C3.1 IC.3 PAD.P$1
N$4: D2.A M1._ Q1.3
N$5: IC.6 SJ2.3
N$6: IC.4 SJ2.1
N$7: Q1.1 R2.1
N$8: C6.1 IC1.3 PAD1.P$1
N$9: IC1.6 SJ1.3
N$10: IC1.4 SJ1.1
N$11: D3.A IC1.1
N$12: D4.A M2._ Q2.3
N$13: Q2.1 R4.1
N$14: LED1.A R3.2
N$15: C9.1 IC2.3 PAD2.P$1
N$16: IC2.6 SJ3.3
N$17: IC2.4 SJ3.1
N$18: D5.A IC2.1
N$19: D6.A M3._ Q3.3
N$20: Q3.1 R6.1
N$21: LED2.A R5.2
N$22: LED3.C R7.1
N$23: C12.1 IC3.3 PAD3.P$1
N$24: IC3.6 J2.2
N$25: IC3.4 J1.2
N$26: CHIP.1 R8.1 S2.1
N$27: CHIP.3 R9.1
N$28: LED4.A R12.1
N$29: MODULE.P$1 X4.1
N$30: MODULE.P$2 X4.2
N$31: IC11.1 JP14.1 R16.1
N$32: IC11.3 R19.1
N$33: C22.1 IC10.3 PAD4.P$1
N$34: IC10.6 SJ5.3
N$35: IC10.4 SJ5.1
N$36: C17.1 IC9.3 PAD5.P$1
N$37: IC9.6 SJ4.3
N$38: IC9.4 SJ4.1
N$39 [zerocross]: B1.AC1 R22.1
N$40 [zerocross]: B1.AC2 IC7.2
N$41 [zerocross]: IC7.1 R22.2
N$42: IC8.1 R24.1
N$43 [AC]: IC8.4 R26.1
N$44 [AC]: R26.2 T1.G
N$45 [AC]: CX1.1 R25.1
N$46: D7.A T2.3 U$1._
N$47: R27.1 T2.2
N$48: LED5.C R17.2
N$49: LED6.C R28.2
N$50: LED7.C R29.2
N$51: LED8.C R30.2
N$52: Q4.1 R31.1 T4.3
N$53 [AC]: D8.A Q4.2 X6.1
N$54: D9.A SG1.- T3.3
N$55: R35.2 R36.1 T3.2
N$56: R34.1 T4.2
N$57: R39.1 S1.1 U1.1
N$58: R38.1 U1.3
N$59: R40.1 U1.17
N$60: JP17.1 R41.1 U1.18
N$61: PWR.A R32.2
N$62: R33.2 WIFI.A
N$63: GS1.B1 R49.1 R50.1
N$64 [GPIO]: LED9.A R42.1
N$65: D10.A LS1.- T5.3
N$66: R44.1 S3.1 U2.1
N$67: R45.1 U2.3
N$68: R47.1 U2.17
N$69: R48.2 U2.16
N$70: R43.1 T5.2
N$71 [AC]: AC.1 U$6.2
N$72 [AC]: AC.2 U$6.1
N$73: LED10.C R53.1
N$74: C34.1 IC16.3 PAD6.P$1
N$75: IC16.6 J3.2
N$76: IC16.4 J4.2
N$77: LED11.C R54.1
N$78: C37.1 IC17.3 PAD7.P$1
N$79: IC17.6 J5.2
N$80: IC17.4 J6.2
NEUTRAL [AC]: B1.+ X5.2
O/P: D1.C JP1.1 R1.1 R2.2
O/P1: D3.C JP2.1 R3.1 R4.2
O/P2: D5.C JP3.1 R5.1 R6.2
O/P3: IC3.1 JP4.2 LED3.A
O/P4: IC16.1 JP21.2 LED10.A
O/P5: IC17.1 JP22.2 LED11.A
P0: IC5.4 JP5.6
P1: IC5.5 JP5.5
P2: IC5.6 JP5.4
P3: IC5.7 JP5.3
P4: IC5.9 JP6.4
P5: IC5.10 JP6.3
P6: IC5.11 JP6.2
P7: IC5.12 JP6.1
RELAY: JP9.1 R27.2
RELAY1: R34.2 U1.19
RX: CHIP.21 JP8.1
RX1: IC11.21 JP13.2 LED7.A
RX2: JP16.2 U1.21
RX3 [GPIO]: JP19.2 U2.21
SCL: CHIP.20 IC5.14 R14.1
SDA: CHIP.19 IC5.15 R13.1
TX: CHIP.22 JP8.2
TX1: IC11.22 JP13.1 LED6.A
TX2: JP16.3 U1.22
TX3 [GPIO]: JP19.1 U2.22
WIFI: CHIP.6 R12.2
ZEROCROSSING: IC7.5 JP9.2 R23.1